# Altium PCB Bluetooth modul.PcbDoc
Units mil, origin at the board's own origin, x right, y up, seen from the top; angles counter-clockwise.
Board outline 885 x 1450 mil, 2 copper layers (Top Layer, Bottom Layer); 12 components, 12 nets, 58 pads, 0 vias.
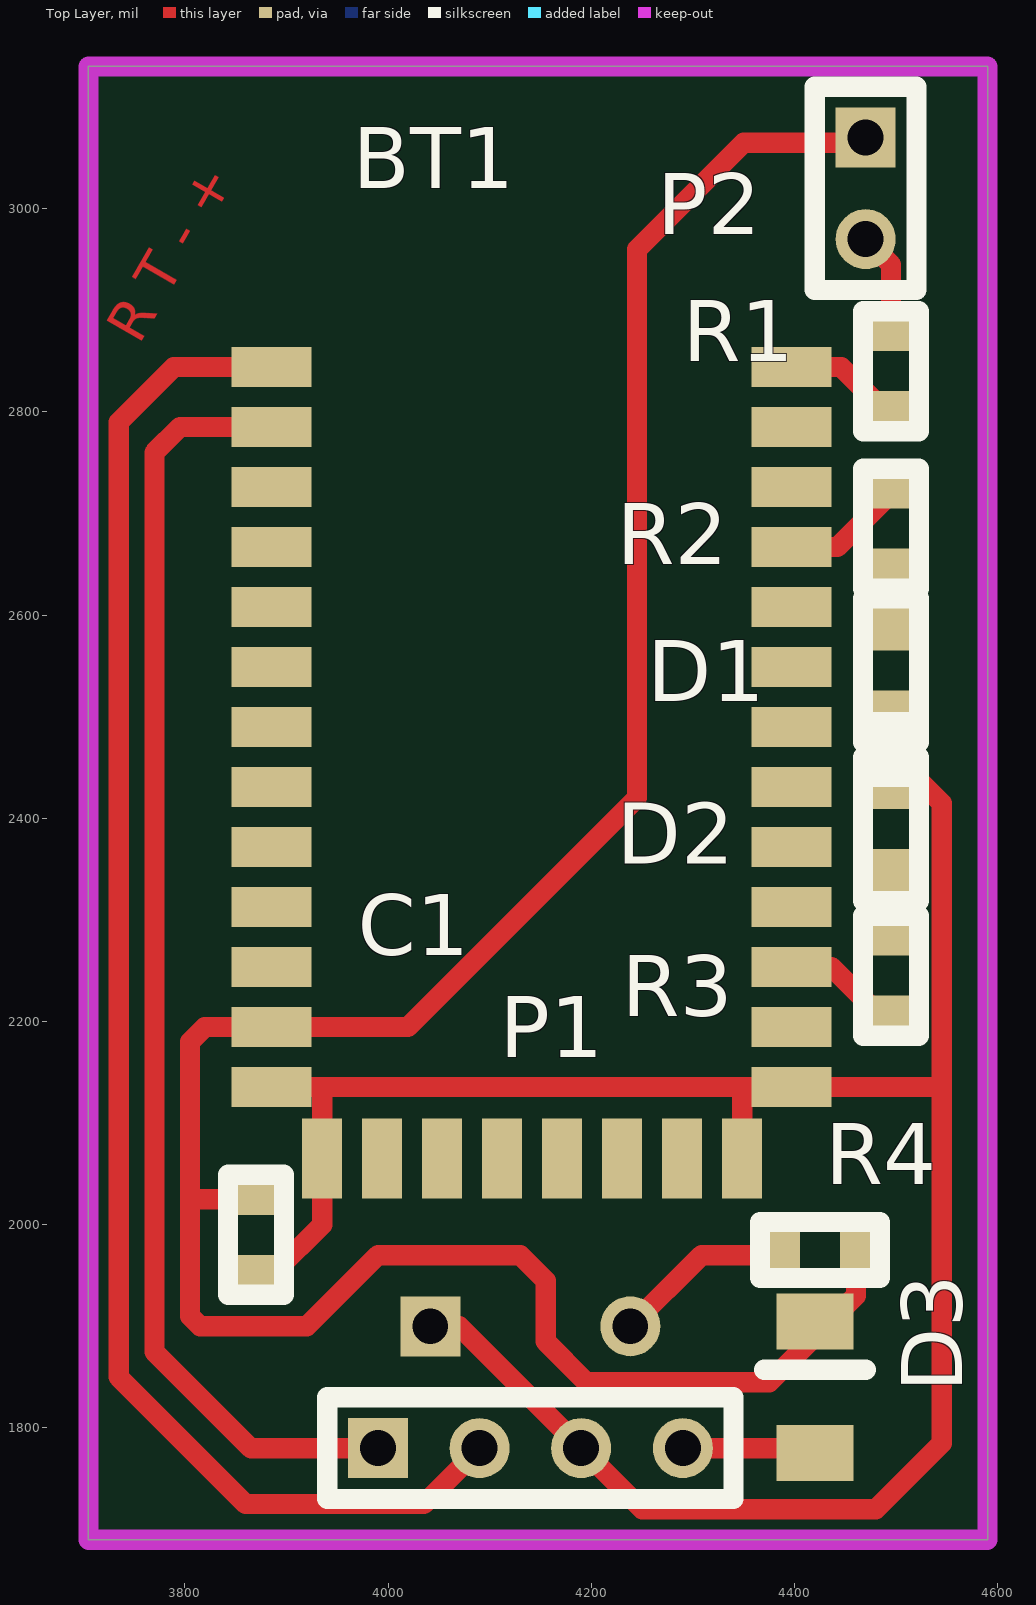
[diagram p0: Top Layer view]
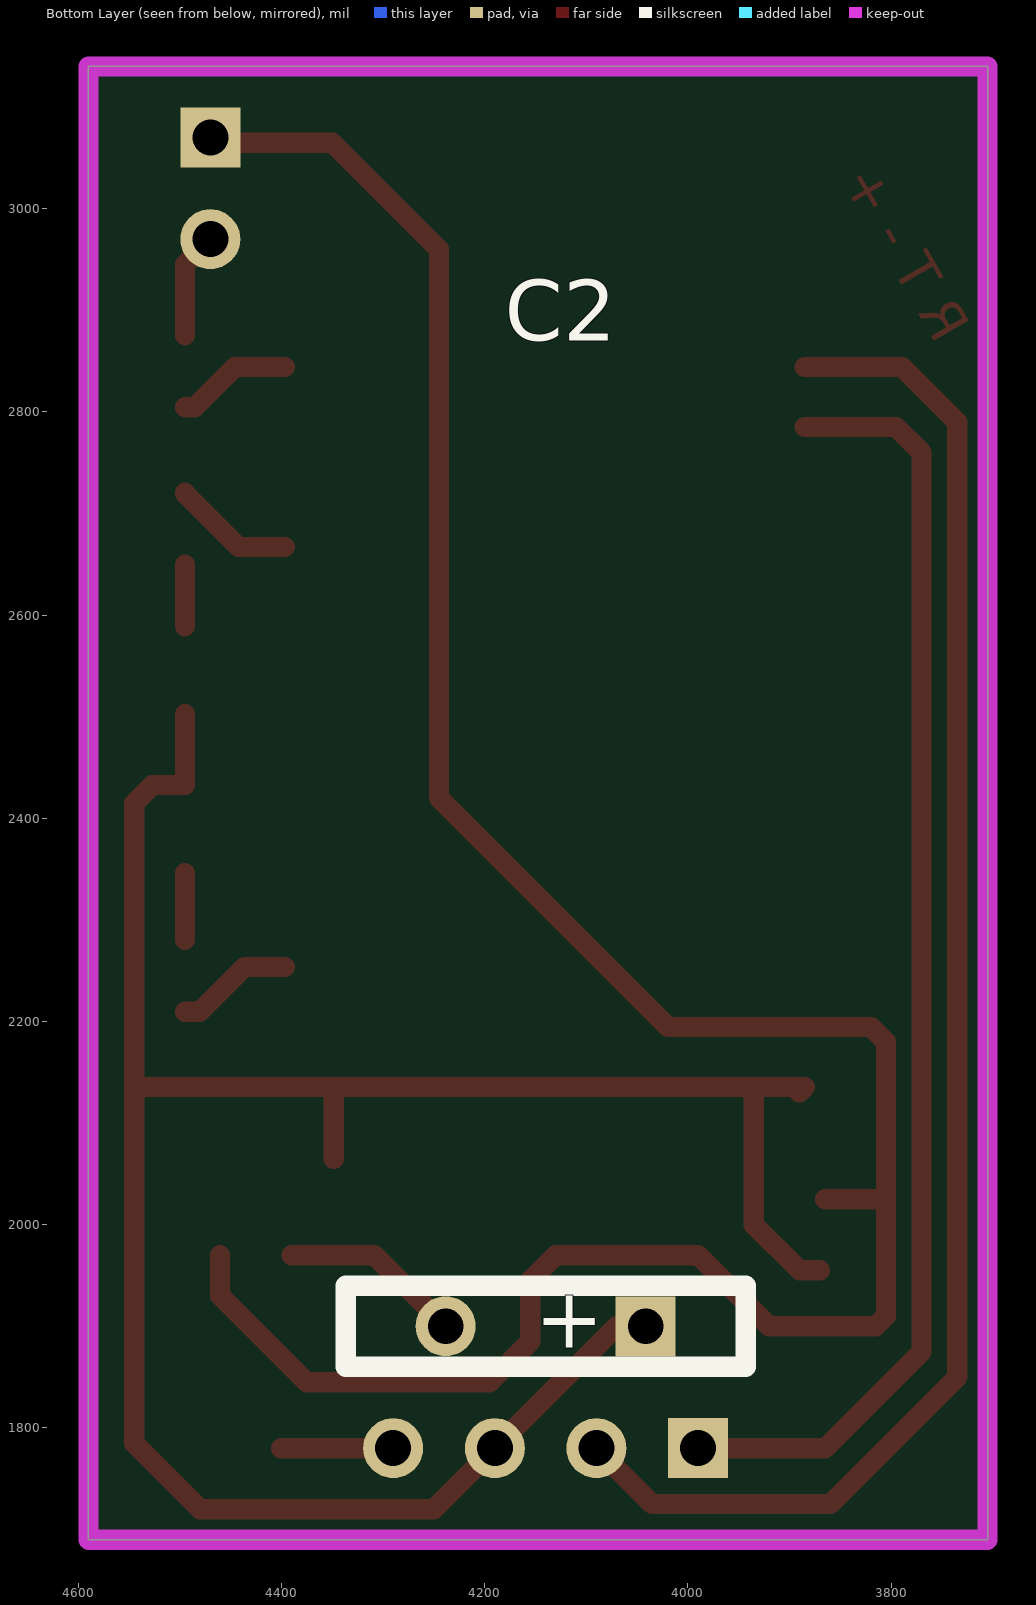
[diagram p1: Bottom Layer view, seen from below]
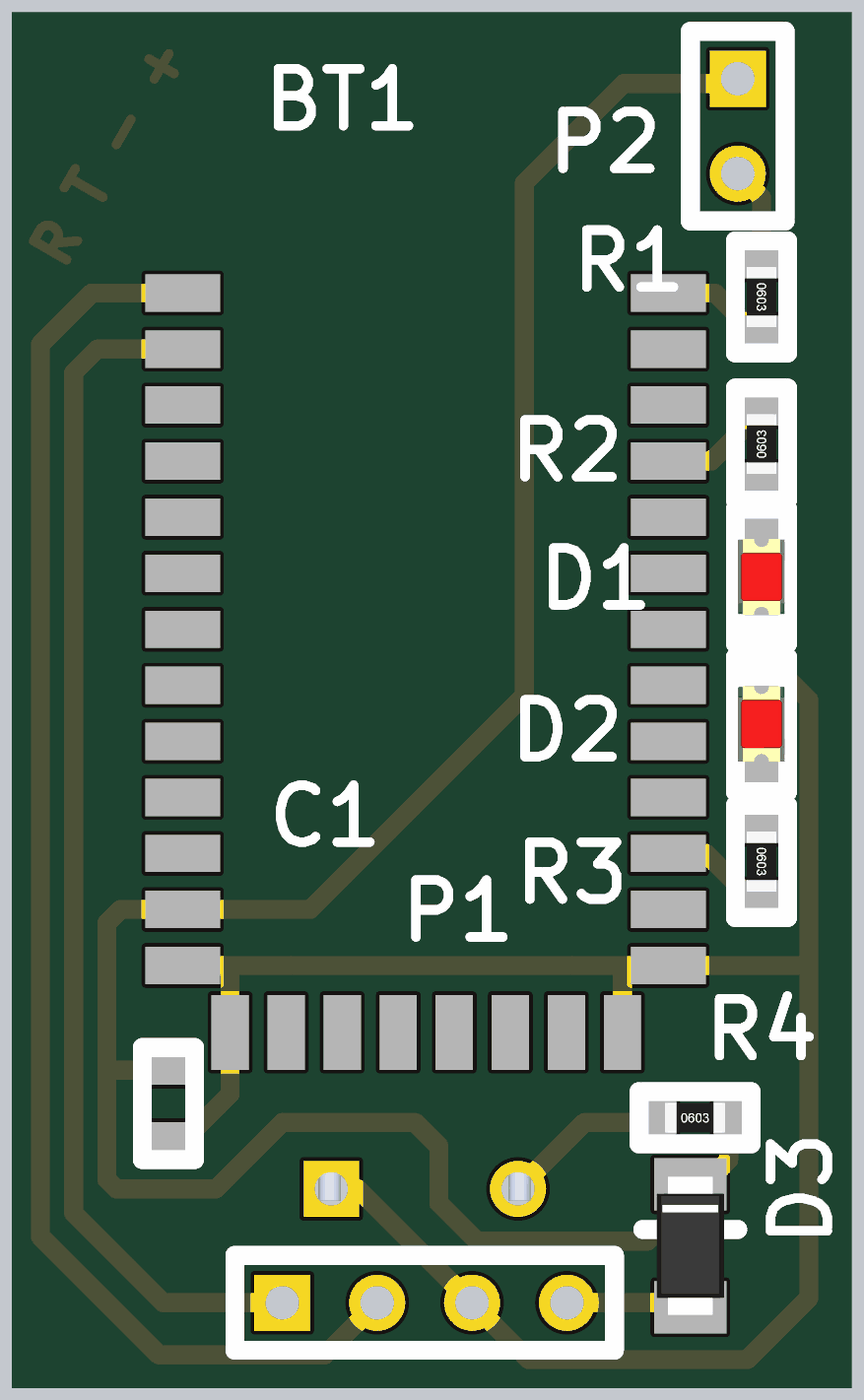
[diagram p2: 3D render of the assembled board from above, using the file's embedded part models]

## Layer stack, top to bottom
Top Layer: signal copper 1.4
Dielectric: dielectric 12.6, FR-4, Dk 4.8
Bottom Layer: signal copper 1.4

## Board outline
3705,1690 4590,1690 4590,3140 3705,3140

## Design rules (kind name [scope] priority, off if disabled: settings)
Clearance [All] p1: gap=10
PolygonConnect [All] p1: connectstyle=Relief reliefconductorwidth=10 reliefentries=4 polygonreliefangle="90 Angle"
RoutingVias [All] p1: holewidth=28 width=50 viastyle="Through Hole" minholewidth=28 minwidth=50 maxholewidth=28 maxwidth=50
SilkscreenOverComponentPads [All] p1: minsilkscreentomaskgap=10
SolderMaskExpansion [All] p1: expansion=4
Width [All] p1: maxlimit=30 minlimit=10 preferedwidth=10
27 further rules are at their usual default settings.

## Components (designator, comment, footprint, x,y, rotation, side; value= is the part's Value field where it differs from the comment)
BT1 "Bluetooth modul" BT_modul 3885,2065 r0 top
C1 "10uF" FP_0603_CAP_080 3870,1990 r90 top
C2 "5F 2V5" Supercapacitor_10x20mm 4140,1900 r0 bottom
D1 "LED" FP_0805_LED_RED 4495,2585 r270 top
D2 "LED" FP_0805_LED_RED 4495,2350 r90 top
D3 "SS13L" subsma 4420,1840 r0 top
P1 "Header 4" HDR1X4 3990,1780 r0 top
P2 "Header 2" HDR1X2 4470,3070 r270 top
R1 "100R" FP_0603_RES 4495,2840 r270 top
R2 "1k" FP_0603_RES 4495,2685 r90 top
R3 "1k" FP_0603_RES 4495,2245 r270 top
R4 "100R" FP_0603_RES 4425,1975 r0 top

## Footprints (in the part's own frame and the unit in brackets; to place one, negate y for a bottom-side part, rotate by r counter-clockwise, add the part's x,y. Pads: shape width x height; smd on the part's side, far side on the other; paste and mask are expansions set on the pad)
BT_modul [mm] "Wireless Bluetooth Transceiver Module RS232 / TTL"
  rect 2x1 smd: 1(0,19.79) 2(0,18.29) 3(0,16.79) 4(0,15.29) 5(0,13.79) 6(0,12.29) 7(0,10.79) 8(0,9.29) 9(0,7.79) 10(0,6.29) 11(0,4.79) 12(0,3.29) 13(0,1.79) 22(13,1.79) 23(13,3.29) 24(13,4.79) 25(13,6.29) 26(13,7.79) 27(13,9.29) 28(13,10.79) 29(13,12.29) 30(13,13.79) 31(13,15.29) 32(13,16.79) 33(13,18.29) 34(13,19.79)
  rect 1x2 smd: 14(1.27,0) 15(2.77,0) 16(4.27,0) 17(5.77,0) 18(7.27,0) 19(8.77,0) 20(10.27,0) 21(11.77,0)
  body extent 0,0 13,26.9, height 2
FP_0603_CAP_080 [mm] "0.8mm magas 0603 kapacitás"
  rect 0.8x0.95 smd: 1(-0.9,0) 2(0.9,0)
  silkscreen extent -1.5,-0.7 1.5,0.7, body extent -0.8,-0.4 0.76,0.4, height 0.8
FP_0603_RES [mm] "0603 ellenállás"
  rect 0.8x0.95 smd: 1(-0.9,0) 2(0.9,0)
  silkscreen extent -1.5,-0.7 1.5,0.7, body extent -0.8,-0.4 0.8,0.4, height 0.44
FP_0805_LED_RED [mm] "0805 méretû piros LED"
  rect 1.2x1.3 smd: A(-0.1,0) K(2.1,0)
  silkscreen extent -0.8,-0.7 2.8,0.7, body extent 0.01,-0.63 2.03,0.62, height 1.1
HDR1X2 [mm] "Connector; Header; 2 Position"
  rect 1.5x1.5 hole 0.9: 1(0,0)
  round 1.5 hole 0.9: 2(2.54,0)
  silkscreen extent -1.27,-1.27 3.81,1.27
HDR1X4 [mm] "Connector; Header; 4 Position"
  rect 1.5x1.5 hole 0.9: 1(0,0)
  round 1.5 hole 0.9: 2(2.54,0) 3(5.08,0) 4(7.62,0)
  silkscreen extent -1.27,-1.27 8.89,1.27
subsma [mil] "nagyfesz egyeniranyito"
  rect 76x55 smd: A(0,-64.75) K(0,64.75)
  silkscreen extent -50,17 50,17, body extent -35,-73 35,73, height 53
Supercapacitor_10x20mm [mm] "5F 2.5V fekvõ szuperkapacitás"
  round 1.5 hole 0.889: N(2.5,0)
  rect 1.5x1.5 hole 0.889: P(-2.5,0)
  silkscreen extent -5,-1.02 5,1.02, body extent -5.08,-22.91 5.08,0.31, height 13.07

## Part data
BT1: "Wireless Bluetooth Transceiver Module RS232 / TTL"
C1: library part CAP, "Capacitor"
C2: library part "Supercap 5F 2V5", "Supercap 5F 2V5"
D1 D2: library part LED_R, "Typical LED"
D3: library part SCHOTTKY, "NXP - PMEG3020EJ,115 - SCHOTTKY RECT 30V 2A SOD323F"
P1: "Header, 4-Pin"
P2: "Header, 2-Pin"
R1 R2 R3 R4: library part RES, "Resistor"

## Nets (pads, with @x,y where several pads share a name; then routed paths per layer and width w, separated by ;. In a path a pad name is that pad's centre, name@x,y a point inside that pad or via, vN(x,y) a via of type N, cw(c..) or ccw(c..) an arc to the next point about the centre after c; other vN are vias at no path point)
GND: BT1.13 BT1.14 BT1.21 BT1.22 C1.1 C2.P D1.K D2.K P1.3 | length 2319.9
  Top Layer w20: C1.1@3870,1955 3890,1955 3935,2000 BT1.14 3935,2135.47 ; BT1.13@3890.47,2130 BT1.13 3935,2135.47 ; C2.P 4070,1900 P1.3 4250,1720 4480,1720 4545,1785 4545,2415 4527.32,2432.68 D2.K D1.K ; BT1.21 4348.39,2133.86 4350,2135.47 ; 4545,2135.47 BT1.22 4350,2135.47 ; 3935,2135.47 4350,2135.47
NetBT1_24: BT1.24 R3.2 | length 116.4
  Top Layer w20: BT1.24 4436.42,2253.58 4480.43,2209.57 R3.2
NetBT1_31: BT1.31 R2.2 | length 120.6
  Top Layer w20: BT1.31 4441.97,2666.97 4495,2720 R2.2
NetBT1_34: BT1.34 R1.2 | length 114.6
  Top Layer w20: BT1.34 4445.87,2844.13 4485.43,2804.57 R1.2
NetC2_N: C2.N R4.1 | length 180.6
  Top Layer w20: C2.N 4308.43,1970 R4.1@4390,1970
NetD1_A: D1.A R2.1 | length 60.6
  Top Layer w20: D1.A R2.1
NetD2_A: D2.A R3.1 | length 65.6
  Top Layer w20: R3.1 D2.A
NetD3_A: D3.A P1.4 | length 110.2
  Top Layer w20: P1.4 D3.A@4400.25,1780
NetP2_2: P2.2 R1.1 | length 104.9
  Top Layer w20: P2.2 4495,2945 R1.1
RX: BT1.2 P1.1 | length 1269.7
  Top Layer w20: BT1.2 3795.08,2785.08 3770,2760 3770,1875 3865,1780 P1.1
TX: BT1.1 P1.2 | length 1542
  Top Layer w20: BT1.1 3789.13,2844.13 3735,2790 3735,1850 3860,1725 4035,1725 P1.2
VCC: BT1.12 C1.2 D3.K P2.1 R4.2 | length 2528.5
  Top Layer w20: 3805,2025 C1.2@3865,2025 ; R4.2@4460.43,1970 4460.43,1930.18 4375.25,1845 4195,1845 4155,1885 4155,1945 4130,1970 3990,1970 3920,1900 3815,1900 3805,1910 3805,2180 3819.53,2194.53 BT1.12 4019.53,2194.53 4245,2420 4245,2960 4350,3065 P2.1@4470,3065
pads on no net: BT1.3 BT1.4 BT1.5 BT1.6 BT1.7 BT1.8 BT1.9 BT1.10 BT1.11 BT1.15 BT1.16 BT1.17 BT1.18 BT1.19 BT1.20 BT1.23 BT1.25 BT1.26 BT1.27 BT1.28 BT1.29 BT1.30 BT1.32 BT1.33

## Keep-outs
Keep-Out Layer:
  the board outline again, w20

## Other copper
Top Layer:
  text "R T - +" at 3755,2865 h40 r60

## Text inside footprints (layer, text, board x,y; h text height)
C2: Bottom Overlay "+" at 4083,1930 h59.06 r180